# Altium PCB _BlinkBoard_micro.PcbDoc (part 1 of 2)
Units mil, origin at the board's own origin, x right, y up, seen from the top; angles counter-clockwise.
Board outline 9350 x 6625 mil, 4 copper layers (Top Layer, Int1 (GND), Int2 (PWR), Bottom Layer), stack 53.912 mil thick; 106 components, 151 nets, 563 pads, 3 vias.
Unrouted connection lines stored in the file: 375.
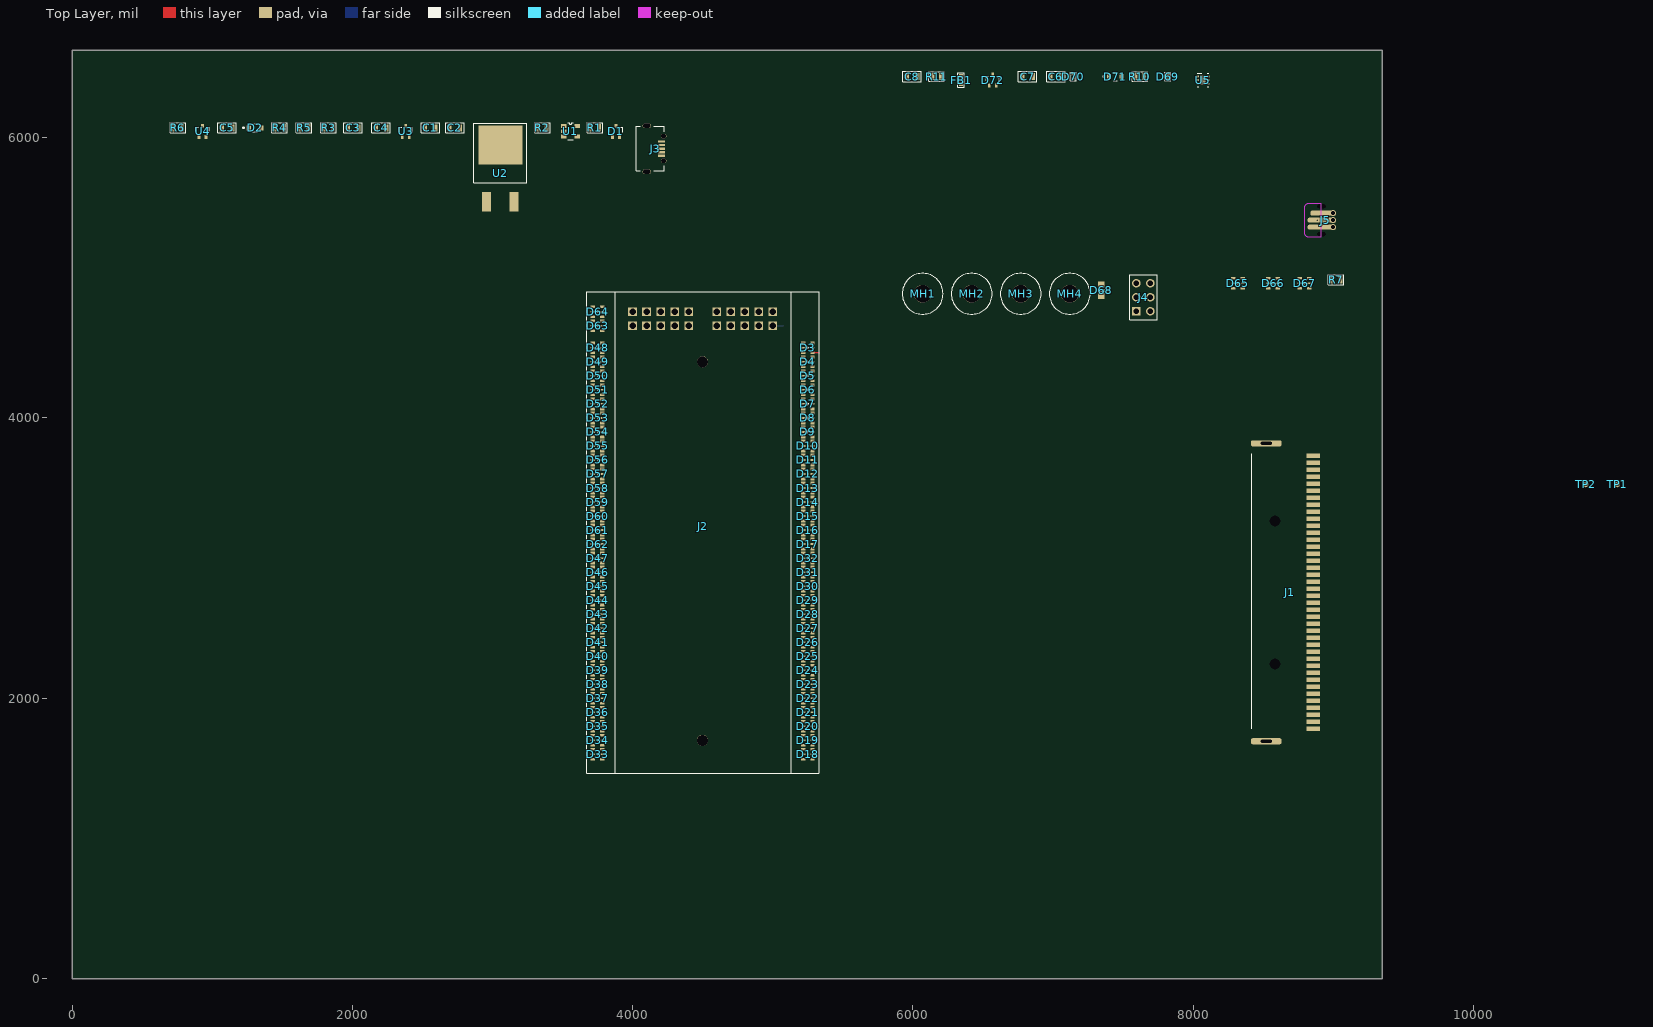
[diagram p0: Top Layer view]
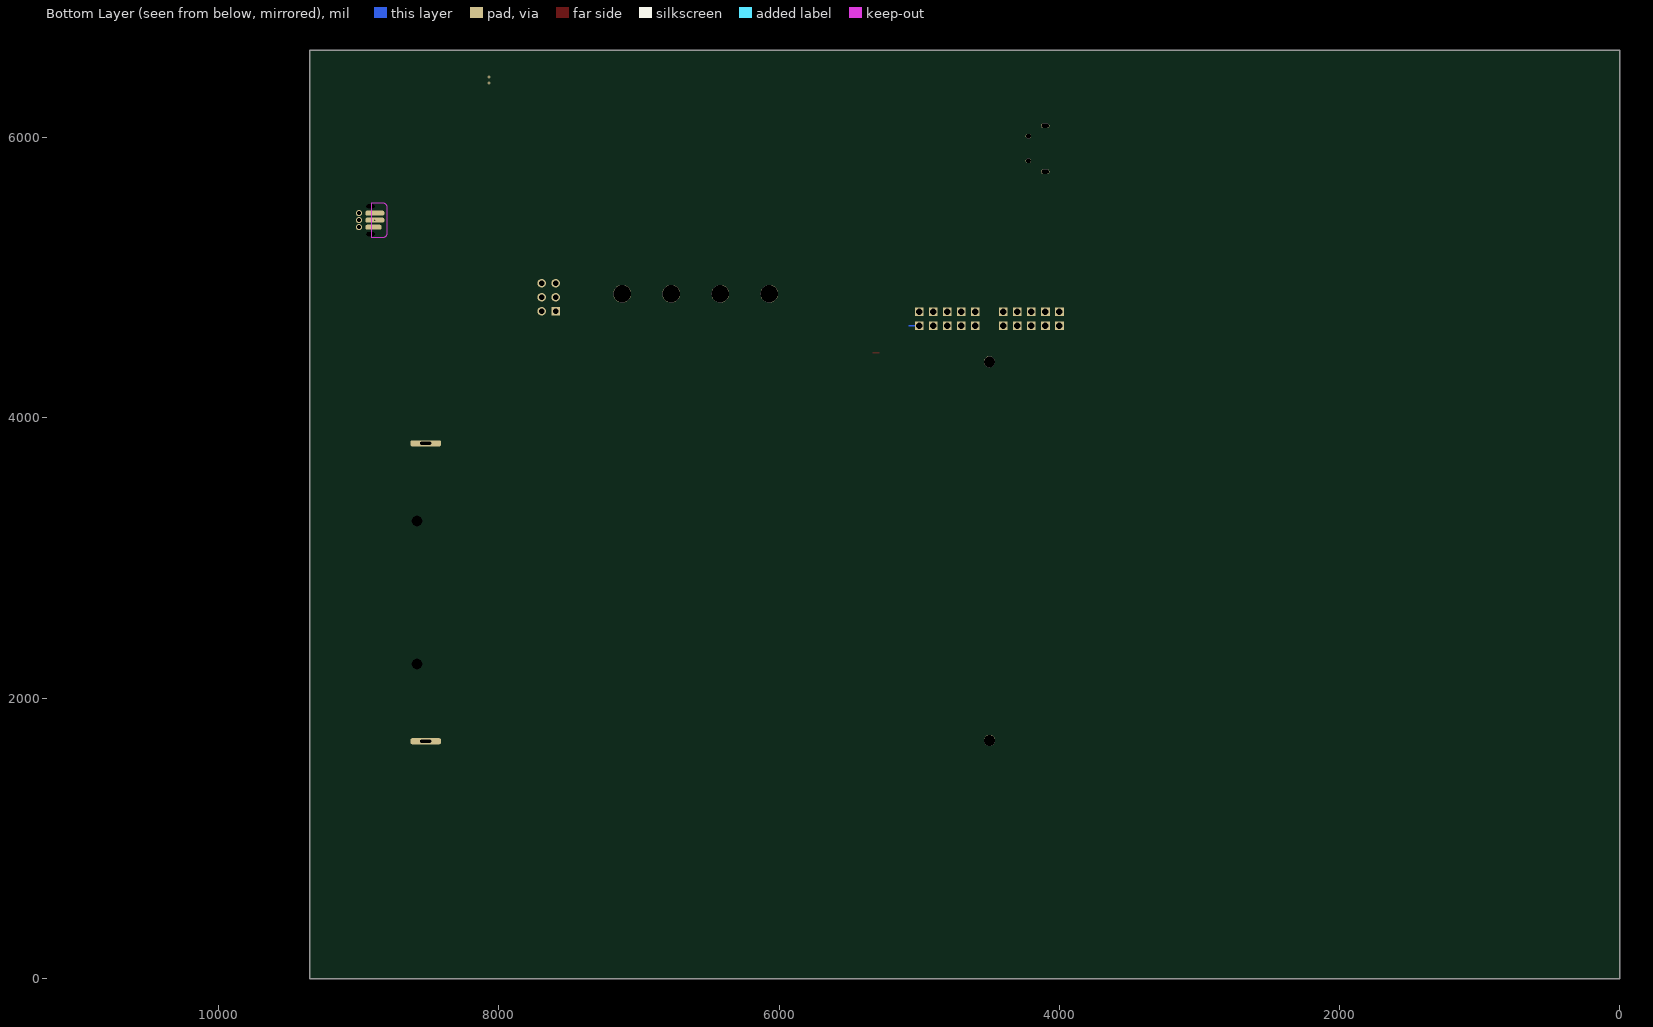
[diagram p1: Bottom Layer view, seen from below]
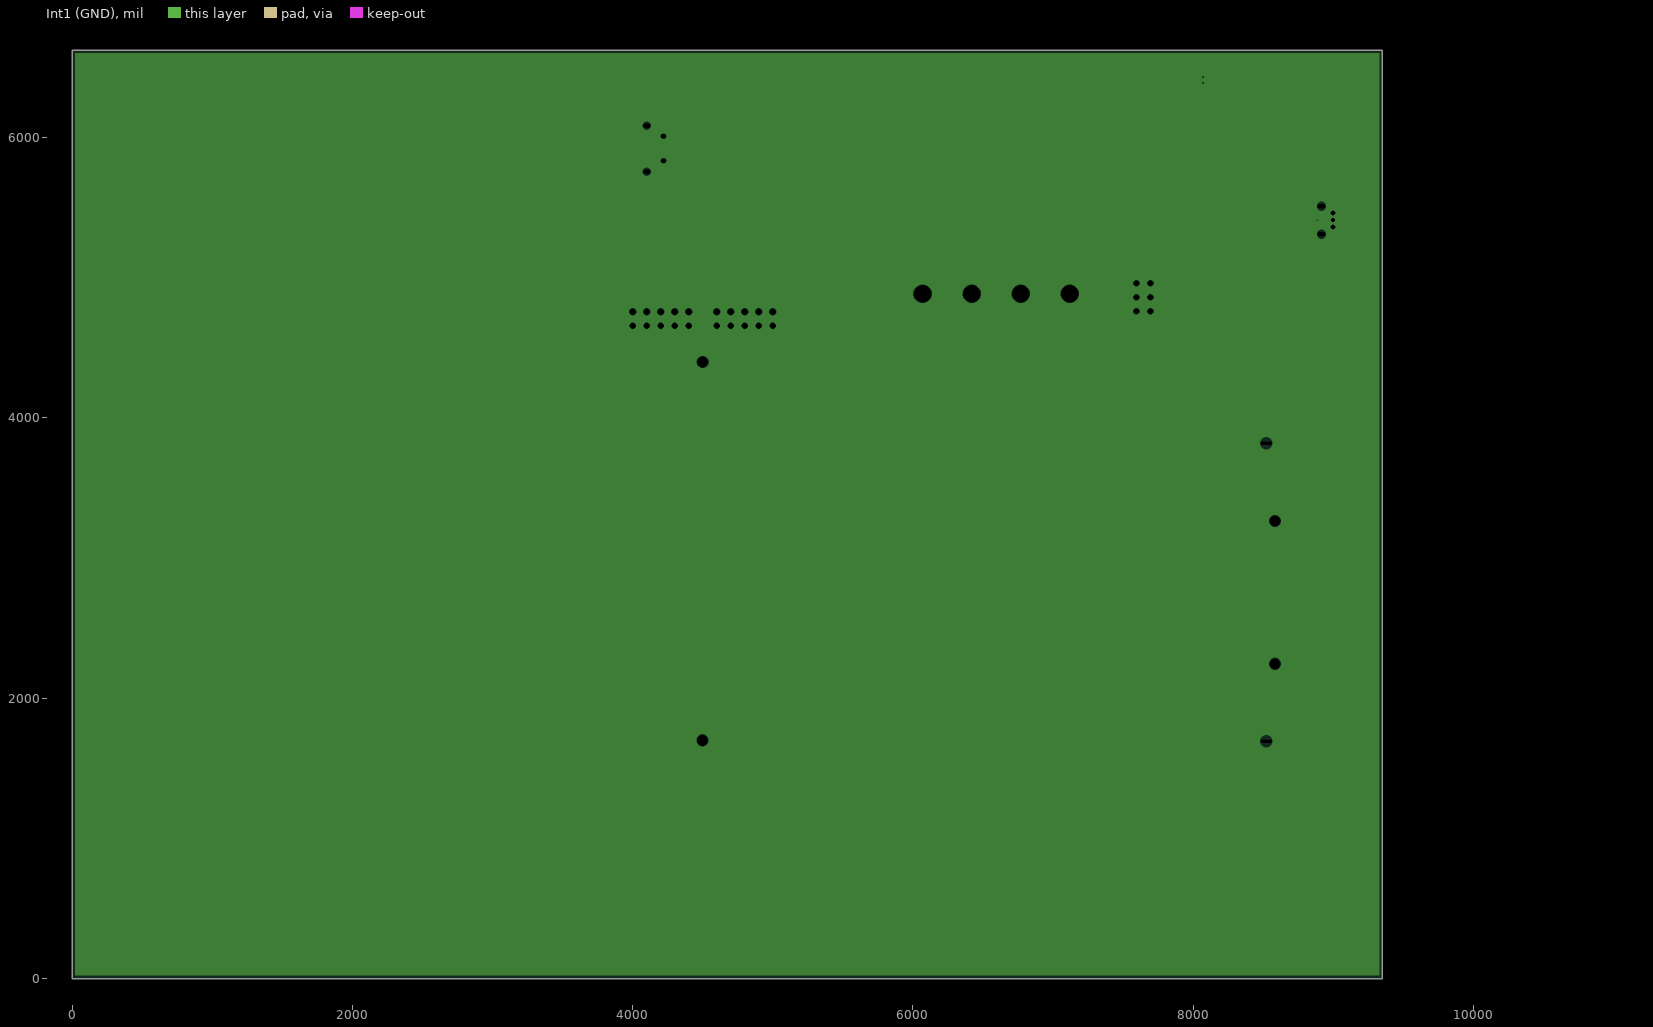
[diagram p2: Int1 (GND), clearances drawn from the general rule]
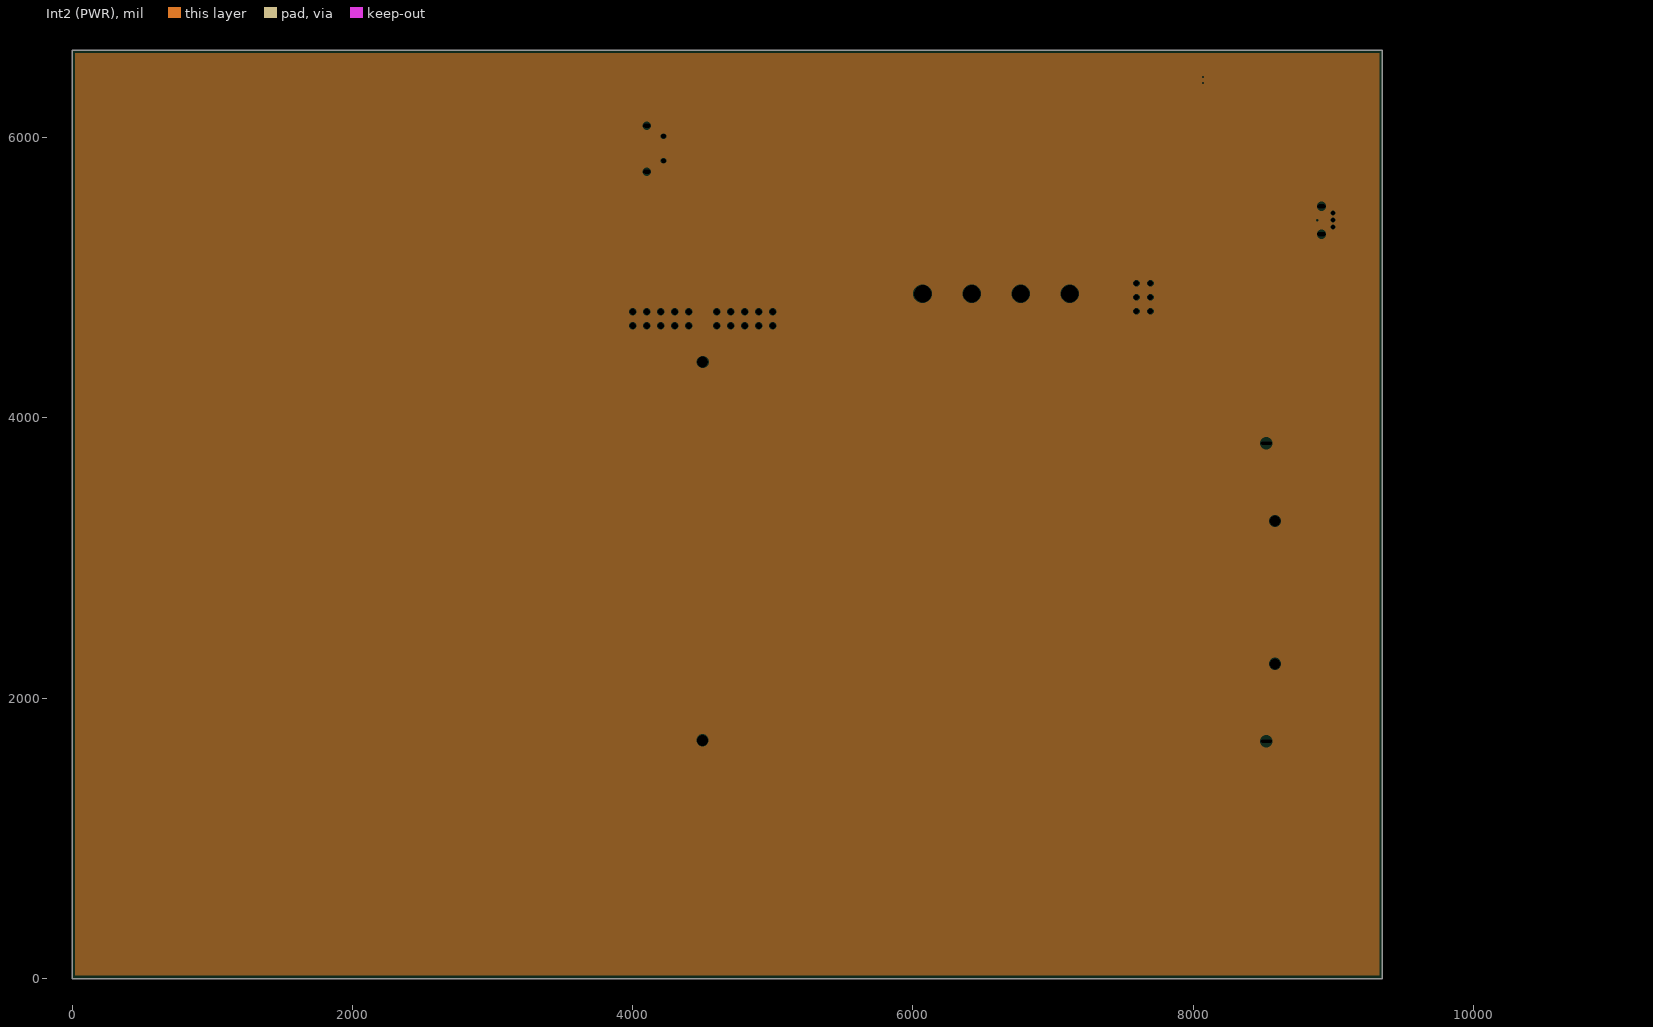
[diagram p3: Int2 (PWR), clearances drawn from the general rule]

## Layer stack, top to bottom
Top Solder: solder mask 1, SM-001, Dk 4
Top Layer: signal copper 1.378
Dielectric 1: prepreg 5.1, PP-017, Dk 4.3
Dielectric 2: prepreg 5.1, PP-017, Dk 4.3
Int1 (GND): plane copper 1.378, net GND
Dielectric 3: core 28, Core-039, Dk 4.8
Int2 (PWR): plane copper 1.378, net +5
Dielectric 4: prepreg 5.1, PP-017, Dk 4.3
Dielectric 5: prepreg 5.1, PP-017, Dk 4.3
Bottom Layer: signal copper 1.378
Bottom Solder: solder mask 1, SM-001, Dk 4

## Board outline
0,0 0,6625 9350,6625 9350,0

## Design rules (kind name [scope] priority, off if disabled: settings)
Clearance Clearance_1 [HasFootprint('APA102-2020')] p1: gap=0 ignorepadtopadclearanceinfootprint=TRUE
Clearance "Around polygon" [IsRegion] p2: gap=11.81 ignorepadtopadclearanceinfootprint=FALSE
Clearance [All] p3: gap=0 ignorepadtopadclearanceinfootprint=TRUE
HoleSize [All] p1: absolutevalues=TRUE maxlimit=137.8 minlimit=7.87 maxpercent=80.000 minpercent=20.000
HoleToHoleClearance [All] p1: gap=12 allowstackedmicrovias=TRUE
MinimumSolderMaskSliver [All] p1: minsoldermaskwidth=0.1
PlaneClearance [All] p1: clearance=3.94
PlaneConnect [All] p1: planeconnectstyle=Direct reliefexpansion=20 reliefentries=4 reliefconductorwidth=10 reliefairgap=10
PolygonConnect [All] p1: connectstyle=Direct reliefconductorwidth=10 reliefentries=4 polygonreliefangle="90 Angle" airgapwidth=10
RoutingVias [All] p1: holewidth=11.81 width=23.62 viastyle="Through Hole" minholewidth=11.81 minwidth=23.62 maxholewidth=11.81 maxwidth=23.62
SilkToSilkClearance [All] p1: silktosilkclearance=3.94
SilkToSolderMaskClearance [IsPad] p1: minsilkscreentomaskgap=3.94 clearancetoexposedcopper=TRUE
SolderMaskExpansion [All] p1: expansion=3.94 istentingtop=FALSE
UnRoutedNet MountingHoles [(InNet('NetMH1_1') AND InNet('NetMH2_1') AND InNet('NetMH3_1') AND InNet('NetMH4_1'))] p1 off:
UnRoutedNet [All] p2:
Width Width_POWER [InNet ('+*') or InNet('GND')] p1: maxlimit=30 minlimit=10 preferedwidth=12
Width [All] p2: maxlimit=12 minlimit=4 preferedwidth=4
22 further rules are at their usual default settings.

## Classes and differential pairs
component class BlinkBoard_micro_v1: C1 C2 C3 C4 C5 D1 D2 D3 D4 D5 D6 D7 D8 D9 D10 D11 D12 D13 D14 D15 D16 D17 D18 D19 D20 D21 D22 D23 D24 D25 D26 D27 D28 D29 D30 D31 D32 D33 D34 D35 D36 D37 D38 D39 D40 D41 D42 D43 D44 D45 D46 D47 D48 D49 D50 D51 D52 D53 D54 D55 D56 D57 D58 D59 D60 D61 D62 D63 D64 D65 D66 D67 D68 J1 J2 J3 J4 MH1 MH2 MH3 MH4 R1 R2 R3 R4 R5 R6 R7 TP1 TP2 U1 U2 U3 U4
component class BlinkBoard_micro_v1_JACDAC: C6 C7 C8 D69 D70 D71 D72 FB1 J5 R10 R11 U5

## Components (designator, comment, footprint, x,y, rotation, side; value= is the part's Value field where it differs from the comment)
C1 "1u" C0805 2556,6070 r0 top
C2 "4u7" C0805 2731,6070 r0 top
C3 "10u" C0805 2006,6070 r0 top
C4 "10u" C0805 2206,6070 r0 top
C5 "1n" C0805 1106,6070 r0 top
C6 "4u7" C0805 7019,6436 r0 top
C7 "4u7" C0805 6819,6436 r0 top
C8 "33p" C0805 5994,6436 r0 top
D1 "1727-2905-1-ND" SOT323 3881,6045 r0 top
D2 "CUS520,H3F" FP-USC-MFG 1306,6070 r0 top
D3 "3587" APA102-2020 5250,4500 r0 top
D4 "3587" APA102-2020 5250,4400 r0 top
D5 "3587" APA102-2020 5250,4300 r0 top
D6 "3587" APA102-2020 5250,4200 r0 top
D7 "3587" APA102-2020 5250,4100 r0 top
D8 "3587" APA102-2020 5250,4000 r0 top
D9 "3587" APA102-2020 5250,3900 r0 top
D10 "3587" APA102-2020 5250,3800 r0 top
D11 "3587" APA102-2020 5250,3700 r0 top
D12 "3587" APA102-2020 5250,3600 r0 top
D13 "3587" APA102-2020 5250,3500 r0 top
D14 "3587" APA102-2020 5250,3400 r0 top
D15 "3587" APA102-2020 5250,3300 r0 top
D16 "3587" APA102-2020 5250,3200 r0 top
D17 "3587" APA102-2020 5250,3100 r0 top
D18 "3587" APA102-2020 5250,1600 r0 top
D19 "3587" APA102-2020 5250,1700 r0 top
D20 "3587" APA102-2020 5250,1800 r0 top
D21 "3587" APA102-2020 5250,1900 r0 top
D22 "3587" APA102-2020 5250,2000 r0 top
D23 "3587" APA102-2020 5250,2100 r0 top
D24 "3587" APA102-2020 5250,2200 r0 top
D25 "3587" APA102-2020 5250,2300 r0 top
D26 "3587" APA102-2020 5250,2400 r0 top
D27 "3587" APA102-2020 5250,2500 r0 top
D28 "3587" APA102-2020 5250,2600 r0 top
D29 "3587" APA102-2020 5250,2700 r0 top
D30 "3587" APA102-2020 5250,2800 r0 top
D31 "3587" APA102-2020 5250,2900 r0 top
D32 "3587" APA102-2020 5250,3000 r0 top
D33 "3587" APA102-2020 3750,1600 r0 top
D34 "3587" APA102-2020 3750,1700 r0 top
D35 "3587" APA102-2020 3750,1800 r0 top
D36 "3587" APA102-2020 3750,1900 r0 top
D37 "3587" APA102-2020 3750,2000 r0 top
D38 "3587" APA102-2020 3750,2100 r0 top
D39 "3587" APA102-2020 3750,2200 r0 top
D40 "3587" APA102-2020 3750,2300 r0 top
D41 "3587" APA102-2020 3750,2400 r0 top
D42 "3587" APA102-2020 3750,2500 r0 top
D43 "3587" APA102-2020 3750,2600 r0 top
D44 "3587" APA102-2020 3750,2700 r0 top
D45 "3587" APA102-2020 3750,2800 r0 top
D46 "3587" APA102-2020 3750,2900 r0 top
D47 "3587" APA102-2020 3750,3000 r0 top
D48 "3587" APA102-2020 3750,4500 r0 top
D49 "3587" APA102-2020 3750,4400 r0 top
D50 "3587" APA102-2020 3750,4300 r0 top
D51 "3587" APA102-2020 3750,4200 r0 top
D52 "3587" APA102-2020 3750,4100 r0 top
D53 "3587" APA102-2020 3750,4000 r0 top
D54 "3587" APA102-2020 3750,3900 r0 top
D55 "3587" APA102-2020 3750,3800 r0 top
D56 "3587" APA102-2020 3750,3700 r0 top
D57 "3587" APA102-2020 3750,3600 r0 top
D58 "3587" APA102-2020 3750,3500 r0 top
D59 "3587" APA102-2020 3750,3400 r0 top
D60 "3587" APA102-2020 3750,3300 r0 top
D61 "3587" APA102-2020 3750,3200 r0 top
D62 "3587" APA102-2020 3750,3100 r0 top
D63 "3587" APA102-2020 3750,4657 r0 top
D64 "3587" APA102-2020 3750,4757 r0 top
D65 "3587" APA102-2020 8319,4961 r0 top
D66 "3587" APA102-2020 8569,4961 r0 top
D67 "3587" APA102-2020 8794,4961 r0 top
D68 "Red" LED0805 7344,4911 r90 top
D69 "D5V0P1B2LP-7B" D5V0P1B2LP 7819,6436 r90 top
D70 "D5V0P1B2LP-7B" D5V0P1B2LP 7144,6436 r90 top
D71 "CUS10S30,H3F" FP-USC-MFG 7444,6436 r0 top
D72 "1727-2905-1-ND" SOT323 6569,6411 r0 top
FB1 "300mR, 1kR @100MHz" BEAD0603 6344,6411 r90 top
J1 "micro:bit edge connector" EDGE_CONNECTOR_40 8856.04,1780.99 r0 top
J2 "BREADBOARD" BREADBOARD 3948,4500 r0 top
J3 "0475901001" USB_MICRO 4206,5870 r0 top
J4 "SSW-103-01-F-D" HDR_6_2.54 7594,4761 r90 top
J5 "Jacdac edge connector" JACDAC_EDGE_CONNECTOR_NO_TRACES 9019,5411 r90 top
MH1 "MH 3.2mm NP" MH3.2MM 6069,4886 r0 top
MH2 "MH 3.2mm NP" MH3.2MM 6419,4886 r0 top
MH3 "MH 3.2mm NP" MH3.2MM 6769,4886 r0 top
MH4 "MH 3.2mm NP" MH3.2MM 7119,4886 r0 top
R1 "10K" R0805 3731,6070 r0 top
R2 "200" R0805 3356,6070 r0 top
R3 "10K" R0805 1831,6070 r0 top
R4 "200" R0805 1481,6070 r0 top
R5 "10K" R0805 1656,6070 r0 top
R6 "10K" R0805 756,6070 r0 top
R7 "160" R0805 9019,4986 r0 top
R10 "1M" R0805 7619,6436 r0 top
R11 "220" R0805 6169,6436 r0 top
TP1 "TEST" "TEST POINT" 11025,3525 r90 top
TP2 "TEST" "TEST POINT" 10800,3525 r90 top
U1 "NCP380LSN10AAT1G" TSOP-5 3556,6045 r0 top
U2 "LD1085D2T33R" D2PAK 3056,5745 r90 top
U3 "BSS138W" SOT323 2381,6045 r0 top
U4 "BSS138W" SOT323 931,6045 r0 top
U5 "TPS2553DRVR-1" DRV0006A_V 8069,6411 r0 top

## Footprints (in the part's own frame and the unit in brackets; to place one, negate y for a bottom-side part, rotate by r counter-clockwise, add the part's x,y. Pads: shape width x height; smd on the part's side, far side on the other; paste and mask are expansions set on the pad)
APA102-2020 [mm]
  rect 0.8x0.5 smd mask+0.1: 1(-0.85,0.9) 3(-0.85,-0.9) 4(0.85,-0.9) 6(0.85,0.9)
  rect 0.8x0.3 smd mask+0.1: 2(-0.85,0) 5(0.85,0)
  silkscreen extent -0.1,-0.2 0.15,0.2, body extent -1,-1 1,1, height 1
BEAD0603 [mm]
  rect 0.75x0.7 smd: 1(-0.725,0) 2(0.725,0)
  silkscreen extent -1.35,-0.58 1.35,0.58, body extent -0.8,-0.4 0.8,0.4, height 0.81
BREADBOARD [mm]
  rect 1.6x1.6 hole 1.2: 1(1.321,6.54) 1(3.861,6.54) 1(6.401,6.54) 1(8.941,6.54) 1(11.481,6.54) 2(1.321,4) 2(3.861,4) 2(6.401,4) 2(8.941,4) 2(11.481,4) 3(16.561,6.54) 3(19.101,6.54) 3(21.641,6.54) 3(24.181,6.54) 3(26.721,6.54) 4(16.561,4) 4(19.101,4) 4(21.641,4) 4(24.181,4) 4(26.721,4)
  round 2 hole 2 unplated: ""(13.97,-71.12) ""(14.021,-2.54)
  silkscreen extent -6.99,-77.09 35.05,10.16, body extent -7.08,-77.19 34.92,9.98, height 8.31
C0805 [mm]
  rect 0.8x1.25 smd mask+0.102: 1(-0.95,0) 2(0.95,0)
  silkscreen extent -1.68,-0.91 1.68,0.91, body extent -1,-0.66 1,0.66, height 0.74
D2PAK [mm]
  rect 3.5x1.6 smd: 1(-5.15,2.5) 3(-5.15,-2.5)
  rect 7x8 smd: 4(5.15,0)
  silkscreen extent -1.7,-4.83 9.09,4.83, body extent -6.67,-5.08 8.6,5.08, height 4.78
D5V0P1B2LP [mm]
  rect 0.4x0.7 smd mask+0.025: 1(-0.35,0) 2(0.35,0)
  silkscreen extent -0.76,-0.56 0.74,0.53, body extent -0.5,-0.3 0.5,0.3, height 0.5
DRV0006A_V [mm] "SON, 6-Leads, Body 2x2mm, Pitch 0.65mm, Thermal Pad 1.6x1mm, TI Recommended"
  rrect33% 0.45x0.3 smd: 1(-0.975,0.65) 2(-0.975,0) 3(-0.975,-0.65) 4(0.975,-0.65) 5(0.975,0) 6(0.975,0.65)
  rrect14% 1x0.7 on Top Paste: 7(0,-0.45) 7(0,0.45)
  rrect10% 1x1.6 smd paste-0.5: 7(0,0)
  silkscreen extent -1.05,-1.2 1.05,1.2, body extent -1.05,-1.05 1.05,1.05, height 0.81
EDGE_CONNECTOR_40 [mm]
  rect 2.5x0.8 smd: 1(0,0) 2(0,1.27) 3(0,2.54) 4(0,3.81) 5(0,5.08) 6(0,6.35) 7(0,7.62) 8(0,8.89) 9(0,10.16) 10(0,11.43) 11(0,12.7) 12(0,13.97) 13(0,15.24) 14(0,16.51) 15(0,17.78) 16(0,19.05) 17(0,20.32) 18(0,21.59) 19(0,22.86) 20(0,24.13) 21(0,25.4) 22(0,26.67) 23(0,27.94) 24(0,29.21) 25(0,30.48) 26(0,31.75) 27(0,33.02) 28(0,34.29) 29(0,35.56) 30(0,36.83) 31(0,38.1) 32(0,39.37) 33(0,40.64) 34(0,41.91) 35(0,43.18) 36(0,44.45) 37(0,45.72) 38(0,46.99) 39(0,48.26) 40(0,49.53)
  rrect50% 5.5x1.1 hole 0.5 slot 2 at 0 deg: ""(-8.51,-2.235) ""(-8.51,51.765)
  round 1.6 hole 2 unplated: ""(-6.9,11.8) ""(-6.9,37.7)
  silkscreen extent -11.1,0 -11.1,49.9
FP-USC-MFG [mm]
  rect 0.8x0.9 smd paste+0 mask+0: 1(-1.15,0) 2(1.15,0)
  silkscreen extent -2.22,-0.72 0.38,0.72, body extent -1.25,-0.64 1.25,0.64, height 1.1
HDR_6_2.54 [mm]
  rect 1.55x1.55 hole 1.04: 1(0,0)
  round 1.55 hole 1.04: 2(0,-2.54) 3(2.54,0) 4(2.54,-2.54) 5(5.08,0) 6(5.08,-2.54)
  silkscreen extent -1.53,-3.74 6.61,1.2, body extent -1.52,-3.75 6.6,1.21, height 8.51
JACDAC_EDGE_CONNECTOR_NO_TRACES [mm] "Jacdac 3 pin connector with no traces"
  rrect78% 0.9x2.95 smd far side paste-1 mask+0: 1(-1.27,3.175)
  rrect78% 0.9x4.3 smd paste-1 mask+0: 1(1.27,2.5)
  round 1.11 / inner round 0.71 / far side round 1.1 hole 0.71 paste-0.254 mask+0: 1(1.27,0.55) 2(0,0.55) 3(-1.27,0.55)
  rrect78% 0.9x3.45 smd far side paste-1 mask+0: 2(0,3.425) 3(1.27,3.425)
  rrect78% 0.9x4.8 smd paste-1 mask+0: 2(0,2.75) 3(-1.27,2.75)
  round 0 hole 0.7 slot 1.5 at 90 deg unplated: ""(-2.52,2.65) ""(2.52,2.65)
  Top Layer keep-out region: -3.075,2.75 -3.07,5.033 -2.987,5.341 -2.761,5.567 -2.453,5.65 -2.453,5.65 2.27,5.65 2.545,5.635 2.794,5.516 2.978,5.31 3.07,5.05 3.07,5.05 3.07,2.75
  Bottom Layer lines w0.2: -1.27,0.85 -1.126,0.85
  Bottom Layer keep-out region: -3.07,2.75 -3.07,5.033 -3.023,5.269 -2.889,5.469 -2.689,5.603 -2.453,5.65 -2.453,5.65 2.27,5.65 2.545,5.635 2.794,5.516 2.978,5.31 3.07,5.05 3.07,5.05 3.07,2.75
LED0805 [mm]
  rect 1.1x1.2 smd: 1(-1.05,0) 2(1.05,0)
  silkscreen extent -0.15,-0.5 0.15,0.5, body extent -1,-0.62 1,0.63, height 0.68
MH3.2MM [mm] "MHNP 3.2mm"
  round 3.2 hole 3.2 unplated: ""(0,0)
  silkscreen extent -3.7,-3.7 3.7,3.7
R0805 [mm]
  rect 0.7x1.3 smd: 1(-0.775,0) 2(0.775,0)
  silkscreen extent -1.4,-0.89 1.4,0.89, body extent -1.15,-0.67 1.15,0.68, height 0.77
SOT323 [mm]
  rect 0.5x0.7 smd mask+0.02: 1(-0.635,-1.016) 2(0.635,-1.016) 3(0,1.016)
  silkscreen extent -1.19,-0.15 1.19,0.71, body extent -1.05,-1.15 1.05,1.15, height 1
"TEST POINT" [mm]
  round 1 smd mask+0.02: 1(0,0)
TSOP-5 [mm]
  rect 1x0.7 smd mask+0.051: 1(-1.2,0.95) 2(-1.2,0) 3(-1.2,-0.95) 4(1.2,-0.95) 5(1.2,0.95)
  silkscreen extent -0.51,-1.52 0.51,1.52, body extent -1.5,-1.55 1.5,1.55, height 1.1
USB_MICRO [mm]
  rect 1.35x0.4 smd mask+0.102: 1(0,0) 2(0,0.65) 3(0,1.3) 4(0,1.95) 5(0,2.6)
  oval 1.5x0.8 hole 0.7 slot 1.3 at 0 deg: 6(-2.667,-2.861) 7(-2.667,5.461)
  oval 1x0.8 hole 0.7 slot 0.85 at 0 deg: 6(0.381,-0.889) 7(0.381,3.556)
  silkscreen extent -4.57,-2.67 0.49,5.33, body extent -5.37,-3.01 0.53,5.64, height 2.74

## Part data
C1: library part C0805_1u, "Surface Mount Ceramic Multilayer Capacitor 1uF -20% to 80% Y5V 25V 0805 Paper T/R", Capacitance=1uF, Case Code (Imperial)=0805, Case Code (Metric)=2012, Dielectric=Y5V, Manufacturer=Yageo, Manufacturer Part Number=CC0805ZRY5V8BB105, Max Operating Temperature=85°C, Min Operating Temperature=-30°C, Package Quantity=1, Resistor Type=Ceramic, Supplier Part Number 1=311-1358-1-ND, Tolerance=80%, Voltage Rating=25V, Case/Package=0805, Category="Ceramic Capacitors", ComponentLink1Description=https://datasheet.ciiva.com/144/mlccorderingcode-144703.pdf?src-supplier=Digi-Key, ComponentLink1URL=https://datasheet.ciiva.com/144/mlccorderingcode-144703.pdf?src-supplier=Digi-Key, ComponentLink2Description=https://datasheet.ciiva.com/26863/getdatasheetpartid-419810-26863011.pdf?src-supplier=Verical, ComponentLink2URL=https://datasheet.ciiva.com/26863/getdatasheetpartid-419810-26863011.pdf?src-supplier=Verical, ComponentLink3Description=https://datasheet.ciiva.com/144/mlccorderingcode-144704.pdf?src-supplier=Digi-Key, ComponentLink3URL=https://datasheet.ciiva.com/144/mlccorderingcode-144704.pdf?src-supplier=Digi-Key, ComponentLink4Description=https://datasheet.ciiva.com/144/mlccorderingcode-144705.pdf?src-supplier=Digi-Key, ComponentLink4URL=https://datasheet.ciiva.com/144/mlccorderingcode-144705.pdf?src-supplier=Digi-Key, ComponentLink5Description=https://datasheet.ciiva.com/13208/upy-gp-np0-16v-to-50v-8-13208251.pdf?src-supplier=Mouser, ComponentLink5URL=https://datasheet.ciiva.com/13208/upy-gp-np0-16v-to-50v-8-13208251.pdf?src-supplier=Mouser, ComponentLink6Description=https://datasheet.ciiva.com/28450/1132289-28450860.pdf?src-supplier=Element14, ComponentLink6URL=https://datasheet.ciiva.com/28450/1132289-28450860.pdf?src-supplier=Element14, Depth=1.25mm, Halogen Free="Halogen Free", Height=0.85mm, Lead Free="Lead Free", Length=2mm, Mount="Surface Mount", Packaging="Tape and Reel", Pricing 1="1=0.14000, 10=0.10200, 50=0.05820, 100=0.04820, 500=0.03378, 1000=0.02796 (USD)", Radiation Hardening=No, REACH SVHC="No SVHC", RoHS=Yes, RoHS Compliant=Yes, Series=CC, Stock 1=285953, Supplier 1=Digi-Key, Termination=SMD/SMT, Thickness=0.033inch, Voltage Rating (DC)=25V, Weight=0.000194oz, Width=0.049inch
C2 C6 C7: library part C0805_4u7, "Multilayer Ceramic Capacitors MLCC - SMD/SMT 4.7uF 6.3V X5R 10%", Capacitance=4.7uF, Case Code (Imperial)=0805, Case Code (Metric)=2012, Dielectric=X5R, Manufacturer=Yageo, Manufacturer Part Number=CC0805KRX5R5BB475, Max Operating Temperature=85°C, Min Operating Temperature=-55°C, Resistor Type=Ceramic, Supplier Part Number 1=311-3422-1-ND, Tolerance=10%, Voltage Rating=6.3V, Case/Package=0805, Category="Ceramic Capacitors", ComponentLink1Description=http://www.mouser.com/ds/2/447/UPY-GPHC_X5R_4V-to-50V_25-1131599.pdf?src-supplier=Mouser, ComponentLink1URL=http://www.mouser.com/ds/2/447/UPY-GPHC_X5R_4V-to-50V_25-1131599.pdf?src-supplier=Mouser, ComponentLink2Description=http://components.arrow.com/part/dataview/0323_04166591?src-supplier=Arrow+Europe, ComponentLink2URL=http://components.arrow.com/part/dataview/0323_04166591?src-supplier=Arrow+Europe, ComponentLink3Description=http://www.yageo.com/documents/recent/UPY-GPHC_X5R_4V-to-50V_25.pdf?src-supplier=Digi-Key, ComponentLink3URL=http://www.yageo.com/documents/recent/UPY-GPHC_X5R_4V-to-50V_25.pdf?src-supplier=Digi-Key, ComponentLink4Description=http://www.yageo.com/documents/recent/UPY-GPHC_X5R_4V-to-50V_23.pdf?src-supplier=Digi-Key, ComponentLink4URL=http://www.yageo.com/documents/recent/UPY-GPHC_X5R_4V-to-50V_23.pdf?src-supplier=Digi-Key, Halogen Free="Halogen Free", Lead Free="Lead Free", Length=0.079inch, Mount="Surface Mount", Number of Pins=2, Packaging="Tape and Reel", Pricing 1="1=0.17000, 10=0.12300, 50=0.07000, 100=0.05800, 500=0.04066, 1000=0.03365 (USD)", RoHS=Yes, RoHS Compliant=Yes, Series=CC, Stock 1=19993, Supplier 1=Digi-Key, Termination=SMD/SMT, Thickness=0.057inch, Voltage Rating (DC)=6.3V, Weight=0.000194oz, Width=0.049inch
C3 C4: library part C0805_10u, "Cap Ceramic 10uF 10Vdc X5R 10% SMD 0805 85°C Paper T/R", Manufacturer=Yageo, Manufacturer Part Number=CC0805KPX5R6BB106, Supplier Part Number 1=13-CC0805KPX5R6BB106CT-ND, ComponentLink1Description=http://datasheet.octopart.com/CC0805KPX5R6BB106-Yageo-datasheet-86397281.pdf, ComponentLink1URL=http://datasheet.octopart.com/CC0805KPX5R6BB106-Yageo-datasheet-86397281.pdf, Pricing 1="1=0.21000, 10=0.14300, 50=0.08560, 100=0.07240, 500=0.04952, 1000=0.04380, 2500=0.04190, 5000=0.03809 (USD)", RoHS Compliant=Yes, Stock 1=54858, Supplier 1=Digi-Key
C5: library part C0805_1n, "Surface Mount Ceramic Multilayer Capacitor 0.001uF 10% X7R 50V 0805 Paper T/R", Capacitance=1nF, Case Code (Imperial)=0805, Case Code (Metric)=2012, Dielectric=X7R, Dielectric Material=Ceramic, Insulation Resistance=100GR, Manufacturer=Yageo, Manufacturer Part Number=CC0805KRX7R9BB102, Max Operating Temperature=125°C, Min Operating Temperature=-55°C, Package Quantity=1, Supplier Part Number 1=311-1127-1-ND, Tolerance=10%, Voltage=50V, Case/Package=0805, Category="Ceramic Capacitors", ComponentLink1Description=https://datasheet.ciiva.com/11786/0900766b80d84f1d-11786074.pdf?src-supplier=RSComponents, ComponentLink1URL=https://datasheet.ciiva.com/11786/0900766b80d84f1d-11786074.pdf?src-supplier=RSComponents, ComponentLink2Description=https://datasheet.ciiva.com/144/mlccorderingcode-144616.pdf?src-supplier=Digi-Key, ComponentLink2URL=https://datasheet.ciiva.com/144/mlccorderingcode-144616.pdf?src-supplier=Digi-Key, ComponentLink3Description=https://datasheet.ciiva.com/144/mlccorderingcode-144617.pdf?src-supplier=Digi-Key, ComponentLink3URL=https://datasheet.ciiva.com/144/mlccorderingcode-144617.pdf?src-supplier=Digi-Key, ComponentLink4Description=https://datasheet.ciiva.com/144/mlccorderingcode-144618.pdf?src-supplier=Digi-Key, ComponentLink4URL=https://datasheet.ciiva.com/144/mlccorderingcode-144618.pdf?src-supplier=Digi-Key, ComponentLink5Description=https://datasheet.ciiva.com/16625/upy-gphc-x7r-6-3v-to-50v-8-16625547.pdf?src-supplier=Avnet+Europe, ComponentLink5URL=https://datasheet.ciiva.com/16625/upy-gphc-x7r-6-3v-to-50v-8-16625547.pdf?src-supplier=Avnet+Europe, ComponentLink6Description=https://datasheet.ciiva.com/46393/1489800-46393302.pdf?src-supplier=Element14, ComponentLink6URL=https://datasheet.ciiva.com/46393/1489800-46393302.pdf?src-supplier=Element14, ComponentLink7Description=https://datasheet.ciiva.com/28450/1489800-28450797.pdf?src-supplier=Element14, ComponentLink7URL=https://datasheet.ciiva.com/28450/1489800-28450797.pdf?src-supplier=Element14, Depth=1.25mm, Halogen Free="Halogen Free", Height=0.6mm, Lead Free="Lead Free", Length=2mm, Material=Ceramic, Mount="Surface Mount", Number of Pins=2, Packaging="Tape and Reel", Pricing 1="1=0.10000, 10=0.07000, 50=0.03800, 100=0.03100, 500=0.02214, 1000=0.01739 (USD)", Radiation Hardening=No, REACH SVHC="No SVHC", RoHS=Yes, RoHS Compliant=Yes, Series=CC, Stock 1=240921, Supplier 1=Digi-Key, Termination=SMD/SMT, Thickness=0.024inch, Voltage Rating=50V, Voltage Rating (DC)=50V, Width=0.049inch
C8: library part C0805_33p, "Cap Ceramic 33pF 50V C0G 5% SMD 0805 125C Paper T/R", Capacitance=33pF, Case Code (Imperial)=0805, Case Code (Metric)=2012, Dielectric=C0G, Dielectric Material=Ceramic, Manufacturer=Yageo, Manufacturer Part Number=CC0805JRNPO9BN330, Max Operating Temperature=125°C, Min Operating Temperature=-55°C, Package Quantity=1, Supplier Part Number 1=311-1105-1-ND, Tolerance=5%, Voltage=50V, Case/Package=0805, Category="Ceramic Capacitors", ComponentLink1Description=https://datasheet.ciiva.com/144/mlccorderingcode-144778.pdf?src-supplier=Digi-Key, ComponentLink1URL=https://datasheet.ciiva.com/144/mlccorderingcode-144778.pdf?src-supplier=Digi-Key, ComponentLink2Description=https://datasheet.ciiva.com/144/mlccorderingcode-144779.pdf?src-supplier=Digi-Key, ComponentLink2URL=https://datasheet.ciiva.com/144/mlccorderingcode-144779.pdf?src-supplier=Digi-Key, ComponentLink3Description=https://datasheet.ciiva.com/144/mlccorderingcode-144780.pdf?src-supplier=Digi-Key, ComponentLink3URL=https://datasheet.ciiva.com/144/mlccorderingcode-144780.pdf?src-supplier=Digi-Key, ComponentLink4Description=https://datasheet.ciiva.com/11464/upy-gp-np0-16v-to-50v-8-11464747.pdf?src-supplier=Avnet, ComponentLink4URL=https://datasheet.ciiva.com/11464/upy-gp-np0-16v-to-50v-8-11464747.pdf?src-supplier=Avnet, ComponentLink5Description=https://datasheet.ciiva.com/8033/1443161-8033942.pdf?src-supplier=Element14, ComponentLink5URL=https://datasheet.ciiva.com/8033/1443161-8033942.pdf?src-supplier=Element14, ComponentLink6Description=https://datasheet.ciiva.com/8033/1443161-8033944.pdf?src-supplier=Element14, ComponentLink6URL=https://datasheet.ciiva.com/8033/1443161-8033944.pdf?src-supplier=Element14, ComponentLink7Description=https://datasheet.ciiva.com/16625/upy-gp-np0-16v-to-50v-8-16625541.pdf?src-supplier=Avnet+Europe, ComponentLink7URL=https://datasheet.ciiva.com/16625/upy-gp-np0-16v-to-50v-8-16625541.pdf?src-supplier=Avnet+Europe, ComponentLink8Description=https://datasheet.ciiva.com/29241/445349-da-01-en-kerko-chip-0805-np0-33pf-5proz-50v-g-29241975.pdf?src-supplier=Conrad, ComponentLink8URL=https://datasheet.ciiva.com/29241/445349-da-01-en-kerko-chip-0805-np0-33pf-5proz-50v-g-29241975.pdf?src-supplier=Conrad, Depth=1.25mm, Height=0.6mm, Lead Free="Lead Free", Length=2mm, Material=Ceramic, Mount="Surface Mount", Packaging="Tape and Reel", Pricing 1="1=0.11000, 10=0.07800, 50=0.04280, 100=0.03490, 500=0.02492, 1000=0.01958 (USD)", Radiation Hardening=No, REACH SVHC=Unknown, Resistor Type=Ceramic, RoHS=Yes, RoHS Compliant=Yes, Series=CC, Stock 1=41012, Supplier 1=Digi-Key, Termination=SMD/SMT, Thickness=0.024inch, Voltage Rating=50V, Voltage Rating (DC)=50V, Width=1.25mm
D1 D72: library part BAT54SW, "Rectifier Diode Schottky 0.2A 5ns Automotive 3-Pin SC-70 T/R", Manufacturer=Nexperia, Manufacturer Part Number=BAT54SW,115, Category="Rectifier Diodes", ComponentLink1Description=http://www.farnell.com/datasheets/1679676.pdf?src-supplier=Farnell, ComponentLink1URL=http://www.farnell.com/datasheets/1679676.pdf?src-supplier=Farnell, ComponentLink2Description=https://assets.nexperia.com/documents/data-sheet/BAT54W_SER.pdf?src-supplier=Digi-Key, ComponentLink2URL=https://assets.nexperia.com/documents/data-sheet/BAT54W_SER.pdf?src-supplier=Digi-Key, Pricing 1="1=0.23000, 10=0.20900, 100=0.11400, 500=0.07018, 1000=0.04785 (USD)", RoHS=Yes, Stock 1=166801, Supplier 1=Digi-Key, Supplier Part Number 1=1727-2905-1-ND
D2: library part SCHOTTKY_0.2A, "Diode Small Signal Schottky Si 0.2A 2-Pin USC T/R", Average Rectified Current=200mA, Manufacturer=Toshiba, Max Operating Temperature=100°C, Max Repetitive Reverse Voltage (Vrrm)=30V, Max Reverse Current=5uA, Min Operating Temperature=-40°C, Peak Non-Repetitive Surge Current=1A, Supplier Part Number 1=CUS520H3FCT-ND, Category="Rectifier Diodes", ComponentLink1Description=https://toshiba.semicon-storage.com/info/docget.jsp?did=7041&prodName=CUS520&src-supplier=Digi-Key, ComponentLink1URL=https://toshiba.semicon-storage.com/info/docget.jsp?did=7041&prodName=CUS520&src-supplier=Digi-Key, ComponentLink2Description=http://toshiba.semicon-storage.com/info/docget.jsp?did=7041&prodName=CUS520&src-supplier=Avnet, ComponentLink2URL=http://toshiba.semicon-storage.com/info/docget.jsp?did=7041&prodName=CUS520&src-supplier=Avnet, ComponentLink3Description=http://toshiba.semicon-storage.com/info/lookup.jsp?pid=CUS520&amp;lang=en&src-supplier=Mouser, ComponentLink3URL=http://toshiba.semicon-storage.com/info/lookup.jsp?pid=CUS520&amp;lang=en&src-supplier=Mouser, Contact Plating=Tin,Silver, Element Configuration=Single, Manufacturer Part Number=CUS520,H3F, Max Reverse Voltage (DC)=30V, Mount="Surface Mount", Number of Pins=2, Packaging="Tape and Reel", Pricing 1="1=0.22000, 10=0.17700, 100=0.09400, 500=0.06188, 1000=0.04208 (USD)", RoHS=No, RoHS Compliant=No, Stock 1=16652, Supplier 1=Digi-Key
D3 D4 D5 D6 D7 D8 D9 D10 D11 D12 D13 D14 D15 D16 D17 D18 D19 D20 D21 D22 D23 D24 D25 D26 D27 D28 D29 D30 D31 D32 D33 D34 D35 D36 D37 D38 D39 D40 D41 D42 D43 D44 D45 D46 D47 D48 D49 D50 D51 D52 D53 D54 D55 D56 D57 D58 D59 D60 D61 D62 D63 D64 D65 D66 D67: library part DOT_STAR_LED, "DotStar Micro LEDs (APA102–2020)- Smart SMD RGB LED - 100 pack", Color=Blue,Green,Red, Manufacturer="Adafruit Industries", Supplier Part Number 1=1528-2392-ND, ComponentLink1Description=https://media.digikey.com/pdf/Data%20Sheets/Adafruit%20PDFs/3587_Web.pdf?src-supplier=Digi-Key, ComponentLink1URL=https://media.digikey.com/pdf/Data%20Sheets/Adafruit%20PDFs/3587_Web.pdf?src-supplier=Digi-Key, Interface=Serial, Length=2mm, Manufacturer Part Number=3587, Mount="Surface Mount", Number of LEDs=100, Pricing 1="1=29.95000 (USD)", RoHS=No, Stock 1=113, Supplier 1=Digi-Key, Width=2mm
D68: library part LED0805, "SMD LED red 2.4 V 0805, 150080RS75000, Würth Elektronik", Case Code (Imperial)=0805, Case Code (Metric)=2012, Forward Current=30mA, Forward Voltage=2V, Manufacturer="Wurth Electronics", Manufacturer Part Number=150080RS75000, Max Operating Temperature=85°C, Min Operating Temperature=-40°C, Package Quantity=4000, Supplier Part Number 1=732-4984-6-ND, Test Current=20mA, Case/Package=0805, Category=LEDs, Color=Red, ComponentLink1Description=https://datasheet.ciiva.com/22656/150080rs75000-22656961.pdf?src-supplier=Element14, ComponentLink1URL=https://datasheet.ciiva.com/22656/150080rs75000-22656961.pdf?src-supplier=Element14, ComponentLink2Description=https://datasheet.ciiva.com/29279/759435-da-01-en-chipled-0805-w-kl-rot-150080rs75000-29279032.pdf?src-supplier=Conrad, ComponentLink2URL=https://datasheet.ciiva.com/29279/759435-da-01-en-chipled-0805-w-kl-rot-150080rs75000-29279032.pdf?src-supplier=Conrad, Dominant Wavelength=625nm, Height=0.7mm, Length=2mm, Lens Style=Clear,Rectangular, Luminous Intensity=150mcd, Mount="Surface Mount", Packaging="Tape and Reel", Pricing 1="1=0.18000, 50=0.16500, 100=0.14200, 500=0.12300 (USD)", REACH SVHC=Unknown, RoHS=Yes, RoHS Compliant=Yes, Stock 1=53458, Supplier 1=Digi-Key, Viewing Angle=140°, Wavelength=625nm, Width=1.25mm
D69 D70: library part ZENER, "TVS DIODE 5.5V 13V DFN1006-2", Breakdown Voltage=7V, Case/Package=DFN, Clamping Voltage=13V, Manufacturer=Diodes, Max Operating Temperature=150°C, Max Power Dissipation=250mW, Max Reverse Leakage Current=100nA, Max Surge Current=4A, Min Breakdown Voltage=6V, Min Operating Temperature=-65°C, Package Quantity=10000, Power Line Protection=No, Resistor Type=Zener, Reverse Standoff Voltage=5.5V, Supplier Part Number 1=D5V0P1B2LP-7BDICT-ND, Category="TVS Diodes", ComponentLink1Description=http://www.mouser.com/ds/2/115/D5V0P1B2LP-368667.pdf?src-supplier=Mouser, ComponentLink1URL=http://www.mouser.com/ds/2/115/D5V0P1B2LP-368667.pdf?src-supplier=Mouser, ComponentLink2Description=http://www.diodes.com/_files/datasheets/D5V0P1B2LP.pdf?src-supplier=Avnet, ComponentLink2URL=http://www.diodes.com/_files/datasheets/D5V0P1B2LP.pdf?src-supplier=Avnet, ComponentLink3Description=https://www.diodes.com/assets/Datasheets/D5V0P1B2LP.pdf?src-supplier=Digi-Key, ComponentLink3URL=https://www.diodes.com/assets/Datasheets/D5V0P1B2LP.pdf?src-supplier=Digi-Key, Contact Plating=Gold, Direction=Bidirectional, Element Configuration=Single, ESD Protection=Yes, Manufacturer Part Number=D5V0P1B2LP-7B, Mount="Surface Mount", Number of Bidirectional Channels=1, Number of Pins=2, Packaging="Tape and Reel", Peak Pulse Current=4A, Peak Pulse Power=250mW, Polarity=Bidirectional, Pricing 1="1=0.28000, 10=0.22700, 100=0.12040, 500=0.07920, 1000=0.05386, 2000=0.04858, 5000=0.04224 (USD)", RoHS=Yes, RoHS Compliant=Yes, Stock 1=24260, Supplier 1=Digi-Key, Termination=SMD/SMT, Working Voltage=5.5V
D71: library part SCHOTTKY_1A, "DIODE SCHOTTKY 30V 1A USC", Average Rectified Current=1A, Case/Package=SOD, Manufacturer=Toshiba, Max Operating Temperature=125°C, Max Reverse Current=500uA, Max Reverse Voltage (DC)=30V, Min Operating Temperature=-55°C, Peak Non-Repetitive Surge Current=5A, Supplier Part Number 1=CUS10S30H3FCT-ND, Category="Rectifier Diodes", ComponentLink1Description=http://toshiba.semicon-storage.com/info/docget.jsp?did=14077&prodName=CUS10S30&src-supplier=Avnet, ComponentLink1URL=http://toshiba.semicon-storage.com/info/docget.jsp?did=14077&prodName=CUS10S30&src-supplier=Avnet, ComponentLink2Description=http://toshiba.semicon-storage.com/info/lookup.jsp?pid=CUS10S30&amp;lang=en&src-supplier=Mouser, ComponentLink2URL=http://toshiba.semicon-storage.com/info/lookup.jsp?pid=CUS10S30&amp;lang=en&src-supplier=Mouser, ComponentLink3Description=https://toshiba.semicon-storage.com/info/docget.jsp?did=14077&prodName=CUS10S30&src-supplier=Digi-Key, ComponentLink3URL=https://toshiba.semicon-storage.com/info/docget.jsp?did=14077&prodName=CUS10S30&src-supplier=Digi-Key, Contact Plating=Tin,Silver, Element Configuration=Single, Manufacturer Part Number=CUS10S30,H3F, Mount="Surface Mount", Number of Pins=2, Packaging="Cut Tape", Pricing 1="1=0.38000, 10=0.28200, 100=0.15950, 500=0.10560, 1000=0.08096 (USD)", RoHS=No, RoHS Compliant=No, Stock 1=85731, Supplier 1=Digi-Key
FB1: library part BEAD0603, "Ferrite Beads Multi-Layer Chip Bead 1KOhm 25% 100MHz 600mA 0603 T/R", Case Code (Imperial)=0603, Case Code (Metric)=1608, Case/Package=SMD/SMT, DC Resistance (DCR)=300mR, Manufacturer="Wurth Electronics", Manufacturer Part Number=742792662, Max Current Rating=600mA, Max Operating Temperature=125°C, Min Operating Temperature=-55°C, Package Quantity=4000, Supplier Part Number 1=732-4670-1-ND, Test Frequency=120MHz, Tolerance=25%, Category="Ferrite Beads and Chips", ComponentLink1Description=https://datasheet.ciiva.com/29364/742792662-29364469.pdf?src-supplier=Digi-Key, ComponentLink1URL=https://datasheet.ciiva.com/29364/742792662-29364469.pdf?src-supplier=Digi-Key, ComponentLink2Description=https://datasheet.ciiva.com/30489/0900766b812a6756-30489145.pdf?src-supplier=RSComponents, ComponentLink2URL=https://datasheet.ciiva.com/30489/0900766b812a6756-30489145.pdf?src-supplier=RSComponents, ComponentLink3Description=https://datasheet.ciiva.com/29364/742792662-29364471.pdf?src-supplier=Digi-Key, ComponentLink3URL=https://datasheet.ciiva.com/29364/742792662-29364471.pdf?src-supplier=Digi-Key, ComponentLink4Description=https://datasheet.ciiva.com/29364/742792662-29364473.pdf?src-supplier=Digi-Key, ComponentLink4URL=https://datasheet.ciiva.com/29364/742792662-29364473.pdf?src-supplier=Digi-Key, Depth=0.8mm, Height=0.8mm, Impedance=1kR, Lead Free="Lead Free", Length=1.6mm, Material=Ferrite, Max DC Current=600mA, Mount="Surface Mount", Number of Lines=1, Packaging="Tape and Reel", Pricing 1="1=0.17000, 50=0.16800, 100=0.15500, 500=0.14800, 1000=0.14100, 2000=0.13400 (USD)", RoHS=Yes, RoHS Compliant=Yes, Stock 1=259725, Supplier 1=Digi-Key, Termination=SMD/SMT, Weight=7.1E-05oz, Width=0.031inch
J1: library part EDGE_CONNECTOR_40, "3887 - SMT Right-Angle Connector for micro:bit", Manufacturer="Adafruit Industries", Manufacturer Part Number=3887, Supplier Part Number 1=1528-2644-ND, ComponentLink1Description=Drawings, ComponentLink1URL=https://cdn-shop.adafruit.com/product-files/3887/3887_datasheet.pdf, Pricing 1="1=2.95000 (USD)", RoHS=No, Stock 1=1, Supplier 1=Digi-Key
J2: library part BREADBOARD_60, "Breadboard with 2 columns of 30 rows + VCC and GND rails"
J3: library part USB_MICRO, "USB - micro AB  Receptacle Connector 5 Position Surface Mount, Right Angle, Horizontal", Manufacturer=Molex, Max Operating Temperature=85°C, Max Voltage Rating (AC)=30V, Min Operating Temperature=-30°C, Package Quantity=1500, Supplier Part Number 1=WM14336CT-ND, Category="USB Connectors", ComponentLink1Description=https://datasheet.ciiva.com/29660/475901001-sd-29660111.pdf?src-supplier=Digi-Key, ComponentLink1URL=https://datasheet.ciiva.com/29660/475901001-sd-29660111.pdf?src-supplier=Digi-Key, Connector Type=USB, Contact Material="Copper Alloy", Depth=6.1mm, Features=Shielded, Gender=Receptacle, Housing Material=Thermoplastic, Length=8.65mm, Manufacturer Part Number=0475901001, Mount="Surface Mount,Horizontal", Number of Contacts=5, Number of Ports=1, Number of Terminals/Pins=5, Orientation="Right Angle", Packaging="Tape and Reel", Pitch=0.65mm, Pricing 1="1=0.97000, 10=0.79900, 100=0.66600 (USD)", Radiation Hardening=No, RoHS=Yes, RoHS Compliant=Yes, Stock 1=6607, Supplier 1=Digi-Key, Termination=Solder
J4: library part HDR_6_2.54, "SAMTEC - SSW-103-01-F-D - CONNECTOR, RECEPTACLE, 6 CONTACTS, 2 ROWS, 2.54 MM", Color=Black, Contact Resistance=10mR, Manufacturer=Samtec, Max Current Rating=7.6A, Max Operating Temperature=125°C, Max Voltage Rating (AC)=550V, Min Operating Temperature=-55°C, Supplier Part Number 1=SAM10016-ND, Category="Headers and Wire Housings", ComponentLink1Description=http://www.farnell.com/datasheets/2550265.pdf?src-supplier=Farnell, ComponentLink1URL=http://www.farnell.com/datasheets/2550265.pdf?src-supplier=Farnell, ComponentLink2Description=http://components.arrow.com/part/dataview/4842126S6546715N1004?src-supplier=Arrow+Electronics, ComponentLink2URL=http://components.arrow.com/part/dataview/4842126S6546715N1004?src-supplier=Arrow+Electronics, ComponentLink3Description=http://components.arrow.com/part/dataview/0323_00788229?src-supplier=Arrow+Europe, ComponentLink3URL=http://components.arrow.com/part/dataview/0323_00788229?src-supplier=Arrow+Europe, ComponentLink4Description=ftp://ftp.samtec.com/webfiles/PDF/SSQ_TH.PDF?src-supplier=Avnet, ComponentLink4URL=ftp://ftp.samtec.com/webfiles/PDF/SSQ_TH.PDF?src-supplier=Avnet, ComponentLink5Description=http://suddendocs.samtec.com/catalog_english/ssw_th.pdf?src-supplier=Digi-Key, ComponentLink5URL=http://suddendocs.samtec.com/catalog_english/ssw_th.pdf?src-supplier=Digi-Key, ComponentLink6Description=ftp://ftp.samtec.com/webfiles/PDF/SSQ_TH.PDF?src-supplier=Avnet+Europe, ComponentLink6URL=ftp://ftp.samtec.com/webfiles/PDF/SSQ_TH.PDF?src-supplier=Avnet+Europe, ComponentLink7Description=http://www.farnell.com/datasheets/2550265.pdf?src-supplier=Newark, ComponentLink7URL=http://www.farnell.com/datasheets/2550265.pdf?src-supplier=Newark, Contact Material=Bronze, Contact Plating=Gold, Depth=4.95mm, Gender=Female, Housing Color=Black, Housing Material=Polymer, Length=8.13mm, Manufacturer Part Number=SSW-103-01-F-D, Mating Cycles=100, Number of Contacts=6, Number of Rows=2, Orientation=Vertical, Packaging=Bulk, Pitch=2.54mm, Pricing 1="1=1.42000, 10=1.28700, 100=1.10290, 500=0.91910, 1000=0.78780, 5000=0.69852, 10000=0.68276 (USD)", Radiation Hardening=No, RoHS=Yes, RoHS Compliant=Yes, Stock 1=1509, Supplier 1=Digi-Key, Termination=Solder
J5: "3 pin Jacdac edge connector 1.27mm pitch", Manufacturer Part Number=JACDAC_EDGE_CONNECTOR, Checked By="S. Hodges", ComponentLink1Description="Yuliang Jacdac cable connector drawing online", ComponentLink1URL=https://github.com/microsoft/jacdac-mdk/blob/main/connector/JACDAC-Connector-by-Yuliang-2020-11-28.pdf, ComponentLink2Description="Jacdac PCB edge connector spec onlin", ComponentLink2URL=https://github.com/microsoft/jacdac-mdk/blob/main/connector/JACDAC_PCB_Edge_Connector_Drawing_JD-PEC-01_rev_01.pdf, Created By="D. Gakure", PCB Type="1.6mm FR4"
MH1 MH2 MH3 MH4: library part MHNP, "Mounting hole 3.2mm non plated"
R1 R3 R5 R6: library part R0805_10K, "Res Thick Film 0805 10K Ohm 5% 1/8W ±100ppm/°C Molded SMD Paper T/R", Case Code (Imperial)=0805, Case Code (Metric)=2012, Manufacturer=Yageo, Manufacturer Part Number=RC0805JR-0710KL, Max Operating Temperature=155°C, Max Power Dissipation=125mW, Min Operating Temperature=-55°C, Resistance=10kR, Resistance Tolerance=5%, Resistor Type="Thick Film", Supplier Part Number 1=311-10KARCT-ND, Temperature Coefficient=100ppm/°C, Voltage Rating=150V, Case/Package=0805, Category="Chip SMD Resistors", ComponentLink1Description=https://datasheet.ciiva.com/7941/444164-7941870.pdf?src-supplier=Element14, ComponentLink1URL=https://datasheet.ciiva.com/7941/444164-7941870.pdf?src-supplier=Element14, ComponentLink2Description=https://datasheet.ciiva.com/7941/444164-7941871.pdf?src-supplier=Element14, ComponentLink2URL=https://datasheet.ciiva.com/7941/444164-7941871.pdf?src-supplier=Element14, ComponentLink3Description=https://datasheet.ciiva.com/7983/444164-7983765.pdf?src-supplier=Element14, ComponentLink3URL=https://datasheet.ciiva.com/7983/444164-7983765.pdf?src-supplier=Element14, Construction=Rectangular, Contact Plating=Tin,Matte, Depth=1.25mm, Features="Moisture Resistant", Height=0.5mm, Lead Free="Lead Free", Length=2mm, Military Standard=Not, Number of Terminations=2, Packaging="Tape and Reel", Power Rating=125mW, Pricing 1="1=0.10000, 10=0.03600, 100=0.01450, 1000=0.00652, 2500=0.00566 (USD)", Radiation Hardening=No, REACH SVHC=Unknown, RoHS=Yes, RoHS Compliant=Yes, Series=RC, Size Code=0805, Stock 1=3609276, Supplier 1=Digi-Key, Termination=SMD/SMT, Tolerance=5%, Width=1.25mm
R2 R4: library part R0805_200, "RES SMD 200 OHM 0.5% 1/8W 0805", Case Code (Imperial)=0805, Case Code (Metric)=2012, Manufacturer=Yageo, Manufacturer Part Number=RT0805DRE07200RL, Max Operating Temperature=155°C, Max Power Dissipation=125mW, Min Operating Temperature=-55°C, Package Quantity=5000, Resistance=200R, Resistor Type="Thin Film", Supplier Part Number 1=311-2816-1-ND, Temperature Coefficient=50ppm/°C, Tolerance=0.5%, Voltage Rating (DC)=150V, Case/Package=0805, Category="Chip SMD Resistors", ComponentLink1Description=https://datasheet.ciiva.com/2569/pyu-rt-1-to-0-05-rohs-l-5-2569311.pdf?src-supplier=Digi-Key, ComponentLink1URL=https://datasheet.ciiva.com/2569/pyu-rt-1-to-0-05-rohs-l-5-2569311.pdf?src-supplier=Digi-Key, Features="Moisture Resistant", Height=0.024inch, Lead Free="Lead Free", Length=0.079inch, Number of Terminations=2, Packaging="Tape and Reel", Pricing 1="1=0.12000, 10=0.11000, 100=0.04220, 1000=0.01855, 2500=0.01602 (USD)", RoHS=Yes, RoHS Compliant=Yes, Series=RT, Stock 1=730, Supplier 1=Digi-Key, Width=0.049inch
R7: library part R0805_160, "RES SMD 160 OHM 5% 1/8W 0805", Case Code (Imperial)=0805, Case Code (Metric)=2012, Manufacturer=Yageo, Manufacturer Part Number=RC0805JR-07160RL, Max Operating Temperature=155°C, Max Power Dissipation=125mW, Min Operating Temperature=-55°C, Package Quantity=1, Resistance=160R, Resistor Type="Thick Film", Supplier Part Number 1=311-160ARCT-ND, Temperature Coefficient=100ppm/°C, Tolerance=5%, Voltage Rating=150V, Case/Package=0805, Category="Chip SMD Resistors", ComponentLink1Description=https://datasheet.ciiva.com/2456/pyu-r-int-thick-7-2456164.pdf?src-supplier=Digi-Key, ComponentLink1URL=https://datasheet.ciiva.com/2456/pyu-r-int-thick-7-2456164.pdf?src-supplier=Digi-Key, ComponentLink2Description=https://datasheet.ciiva.com/2456/pyu-r-int-thick-7-2456165.pdf?src-supplier=Digi-Key, ComponentLink2URL=https://datasheet.ciiva.com/2456/pyu-r-int-thick-7-2456165.pdf?src-supplier=Digi-Key, ComponentLink3Description=https://datasheet.ciiva.com/2456/pyu-r-int-thick-7-2456166.pdf?src-supplier=Digi-Key, ComponentLink3URL=https://datasheet.ciiva.com/2456/pyu-r-int-thick-7-2456166.pdf?src-supplier=Digi-Key, Construction=Rectangular, Contact Plating=Tin,Matte, Depth=1.25mm, Features="Moisture Resistant", Height=0.024inch, Lead Free="Lead Free", Length=2mm, Military Standard=Not, Number of Terminations=2, Packaging="Tape and Reel", Power Rating=125mW, Pricing 1="1=0.10000, 10=0.03600, 100=0.01450, 1000=0.00652, 2500=0.00566 (USD)", Radiation Hardening=No, RoHS=Yes, RoHS Compliant=Yes, Series=RC, Stock 1=42846, Supplier 1=Digi-Key, Termination=SMD/SMT, Voltage Rating (DC)=150V, Width=1.25mm
R10: library part R0805_1M, "RES SMD 1M OHM 0.1% 1/8W 0805", Case Code (Imperial)=0805, Case Code (Metric)=2012, Manufacturer=Yageo, Manufacturer Part Number=RT0805BRE071ML, Max Operating Temperature=125°C, Min Operating Temperature=-55°C, Power Rating=125mW, Resistance=1MR, Resistor Type="Thin Film", Supplier Part Number 1=YAG4967CT-ND, Temperature Coefficient=50ppm/°C, Tolerance=0.1%, Voltage Rating=150V, Case/Package=0805, Category="Chip SMD Resistors", ComponentLink1Description=https://datasheet.ciiva.com/8896/pyu-rt-1-to-0-05-rohs-l-4-8896102.pdf?src-supplier=Avnet, ComponentLink1URL=https://datasheet.ciiva.com/8896/pyu-rt-1-to-0-05-rohs-l-4-8896102.pdf?src-supplier=Avnet, ComponentLink2Description=https://datasheet.ciiva.com/12723/pyu-rt-1-to-0-05-rohs-l-4-12723621.pdf?src-supplier=Mouser, ComponentLink2URL=https://datasheet.ciiva.com/12723/pyu-rt-1-to-0-05-rohs-l-4-12723621.pdf?src-supplier=Mouser, Contact Plating=Tin,Matte, Height=500um, Lead Free="Lead Free", Length=2mm, Packaging="Tape and Reel", Pricing 1="1=0.40000, 10=0.31000, 100=0.13050, 1000=0.07200, 2500=0.06750 (USD)", Radiation Hardening=No, RoHS=Yes, RoHS Compliant=Yes, Series=RT, Stock 1=10866, Supplier 1=Digi-Key, Termination=SMD/SMT, Voltage Rating (DC)=150V, Width=1.25mm
R11: library part R0805_220, "Res General Purpose Thick Film 0805 220 Ohm 5% 1/8W ±100ppm/°C Molded SMD Paper T/R", Case Code (Imperial)=0805, Case Code (Metric)=2012, Manufacturer=Yageo, Manufacturer Part Number=RC0805JR-07220RL, Max Operating Temperature=155°C, Max Power Dissipation=125mW, Min Operating Temperature=-55°C, Resistance=220R, Resistance Tolerance=5%, Resistor Type="Thick Film", Supplier Part Number 1=311-220ARCT-ND, Temperature Coefficient=100ppm/°C, Voltage Rating=150V, Case/Package=0805, Category="Chip SMD Resistors", ComponentLink1Description=https://datasheet.ciiva.com/7941/442941-7941917.pdf?src-supplier=Element14, ComponentLink1URL=https://datasheet.ciiva.com/7941/442941-7941917.pdf?src-supplier=Element14, ComponentLink2Description=https://datasheet.ciiva.com/7941/442941-7941918.pdf?src-supplier=Element14, ComponentLink2URL=https://datasheet.ciiva.com/7941/442941-7941918.pdf?src-supplier=Element14, ComponentLink3Description=https://datasheet.ciiva.com/16914/rc0805-16914046.pdf?src-supplier=Future+Electronics, ComponentLink3URL=https://datasheet.ciiva.com/16914/rc0805-16914046.pdf?src-supplier=Future+Electronics, Construction=Rectangular, Contact Plating=Tin,Matte,Lead, Depth=1.25mm, Features="Moisture Resistant", Lead Free="Lead Free", Length=2mm, Military Standard=Not, Number of Terminations=2, Packaging="Tape and Reel", Power Rating=125mW, Pricing 1="1=0.10000, 10=0.03600, 100=0.01450, 1000=0.00652, 2500=0.00566 (USD)", Radiation Hardening=No, REACH SVHC=Unknown, RoHS=Yes, RoHS Compliant=Yes, Series=RC, Size Code=0805, Stock 1=650208, Supplier 1=Digi-Key, Termination=SMD/SMT, Tolerance=5%
TP1 TP2: "Test point"
U1: library part NCP380, "REEL / OVER CURRENT PROTECTION", Case/Package=TSOP, Current Rating=1A, Manufacturer="ON Semiconductor", Max Input Voltage=5.5V, Max Operating Temperature=85°C, Max Power Dissipation=325mW, Min Input Voltage=2.5V, Min Operating Temperature=-40°C, On-State Resistance=135mR, On-state Resistance-Max=110MR, Package Quantity=1, Supplier Part Number 1=NCP380LSN10AAT1GOSCT-ND, Category="USB Interface ICs", ComponentLink1Description=https://datasheet.ciiva.com/1939/ncp380-d-1939778.pdf?src-supplier=Digi-Key, ComponentLink1URL=https://datasheet.ciiva.com/1939/ncp380-d-1939778.pdf?src-supplier=Digi-Key, ComponentLink2Description=https://datasheet.ciiva.com/1939/ncp380-d-1939779.pdf?src-supplier=Digi-Key, ComponentLink2URL=https://datasheet.ciiva.com/1939/ncp380-d-1939779.pdf?src-supplier=Digi-Key, ComponentLink3Description=https://datasheet.ciiva.com/1939/ncp380-d-1939780.pdf?src-supplier=Digi-Key, ComponentLink3URL=https://datasheet.ciiva.com/1939/ncp380-d-1939780.pdf?src-supplier=Digi-Key, ComponentLink4Description=https://datasheet.ciiva.com/16468/ncp380-d-16468713.pdf?src-supplier=Future+Electronics, ComponentLink4URL=https://datasheet.ciiva.com/16468/ncp380-d-16468713.pdf?src-supplier=Future+Electronics, Halogen Free="Halogen Free", Height=1mm, Interface=On/Off, Lead Free="Lead Free", Length=3mm, Manufacturer Part Number=NCP380LSN10AAT1G, Max Output Current=1A, Mount="Surface Mount", Number of Inputs=2, Number of Outputs=1, Number of Pins=5, Number of Switches=1, Operating Supply Voltage=5.5V, Output Configuration="High Side", Output Current=1A, Packaging="Tape and Reel", Pricing 1="1=0.76000, 10=0.66500, 25=0.62440, 100=0.50950, 250=0.47328, 500=0.40280, 1000=0.33250 (USD)", Rated Current-Max=1A, RoHS=Yes, RoHS Compliant=Yes, Series=-, Supplier 1=Digi-Key, Supplier 2=Digi-Key, Turn-Off Delay Time=3ms, Turn-On Delay Time=4ms, Width=1.5mm
U2: "Fixed LDO Voltage Regulator, 6.3V to 30V, 1.3V Dropout, 3.3Vout, 3Aout, TO-263-3", Case/Package=TO-263, Dropout Voltage=1.3V, Input Bias Current=5mA, Manufacturer=STMicroelectronics, Max Input Voltage=30V, Max Operating Temperature=125°C, Max Output Current=3A, Max Output Voltage=3.333V, Min Input Voltage=6.3V, Min Operating Temperature=-40°C, Min Output Voltage=3.3V, Min Supply Voltage=4.9V, Output Voltage Accuracy=1%, Package Quantity=1, Quiescent Current=10mA, Supplier Part Number 1=497-1222-6-ND, Accuracy=1%, ComponentLink1Description=https://datasheet.ciiva.com/16375/cd00001883-16375381.pdf, ComponentLink1URL=https://datasheet.ciiva.com/16375/cd00001883-16375381.pdf, ComponentLink2Description=https://datasheet.ciiva.com/1511/1761309-1511542.pdf, ComponentLink2URL=https://datasheet.ciiva.com/1511/1761309-1511542.pdf, ComponentLink3Description=https://datasheet.ciiva.com/22694/1761309-22694841.pdf, ComponentLink3URL=https://datasheet.ciiva.com/22694/1761309-22694841.pdf, ComponentLink4Description=https://datasheet.ciiva.com/2044/cd00001883-2044187.pdf, ComponentLink4URL=https://datasheet.ciiva.com/2044/cd00001883-2044187.pdf, ComponentLink5Description=https://datasheet.ciiva.com/15111/getdatasheetpartid-65476-15111291.pdf, ComponentLink5URL=https://datasheet.ciiva.com/15111/getdatasheetpartid-65476-15111291.pdf, ComponentLink6Description=https://datasheet.ciiva.com/2044/cd00001883-2044188.pdf, ComponentLink6URL=https://datasheet.ciiva.com/2044/cd00001883-2044188.pdf, ComponentLink7Description=https://datasheet.ciiva.com/2044/cd00001883-2044189.pdf, ComponentLink7URL=https://datasheet.ciiva.com/2044/cd00001883-2044189.pdf, ComponentLink8Description=https://datasheet.ciiva.com/41439/001184676-da-01-en-ic-reg-ldo-3-3-ld1085d2t33r-to-263-3-stm-41439834.pdf, ComponentLink8URL=https://datasheet.ciiva.com/41439/001184676-da-01-en-ic-reg-ldo-3-3-ld1085d2t33r-to-263-3-stm-41439834.pdf, Contact Plating=Tin,Matte, Height=4.6mm, Lead Free="Lead Free", Length=10.4mm, Manufacturer Part Number=LD1085D2T33R, Max Supply Voltage=30V, Mount="Surface Mount", Nominal Output Voltage=3.3V, Number of Outputs=1, Number of Pins=3, Number of Regulators=1, Output Current=3A, Output Voltage=3.3V, Packaging="Tape and Reel", Polarity=Positive, Pricing 1="1=1.46, 10=1.305, 100=1.0176, 500=0.84066 (USD)", Radiation Hardening=No, REACH SVHC="No SVHC", Stock 1=5416, Supplier 1=Digi-Key, Termination=SMD/SMT, Weight=0.01lb, Width=9.35mm
U3 U4: "MOSFET 50V N-CH Logic Level", Drain-Source On Resistance-Max="3.5 O", Drain-to-Source Voltage [Vdss]="50 V", Manufacturer="Fairchild Semiconductor", Rated Power Dissipation="340 mW", Supplier Part Number 1=BSS138WCT-ND, Channel Type=N-Channel, ComponentLink1Description=https://datasheet.ciiva.com/17170/bss138w-17170739.pdf, ComponentLink1URL=https://datasheet.ciiva.com/17170/bss138w-17170739.pdf, ComponentLink2Description=https://datasheet.ciiva.com/8115/bss138w-8115367.pdf, ComponentLink2URL=https://datasheet.ciiva.com/8115/bss138w-8115367.pdf, ComponentLink3Description=https://datasheet.ciiva.com/15043/bss138w-15043927.pdf, ComponentLink3URL=https://datasheet.ciiva.com/15043/bss138w-15043927.pdf, ComponentLink4Description=https://datasheet.ciiva.com/15043/bss138w-15043928.pdf, ComponentLink4URL=https://datasheet.ciiva.com/15043/bss138w-15043928.pdf, ComponentLink5Description=https://datasheet.ciiva.com/15043/bss138w-15043929.pdf, ComponentLink5URL=https://datasheet.ciiva.com/15043/bss138w-15043929.pdf, ComponentLink6Description=https://datasheet.ciiva.com/8115/bss138w-8115370.pdf, ComponentLink6URL=https://datasheet.ciiva.com/8115/bss138w-8115370.pdf, ComponentLink7Description=https://datasheet.ciiva.com/26146/bss138w-26146843.pdf, ComponentLink7URL=https://datasheet.ciiva.com/26146/bss138w-26146843.pdf, ComponentLink8Description=https://datasheet.ciiva.com/13042/bss138w-91619-13042909.pdf, ComponentLink8URL=https://datasheet.ciiva.com/13042/bss138w-91619-13042909.pdf, Manufacturer Part Number=BSS138W, Qg Gate Charge="1.1 nC", Stock 1=55420, Supplier 1=Digi-Key